# Altium PCB MedidorCO2_ver2.PcbDoc
Units mil, origin at the board's own origin, x right, y up, seen from the top; angles counter-clockwise.
Board outline 3307.09 x 3307.09 mil, 2 copper layers (Top Layer, Bottom Layer); 52 components, 35 nets, 196 pads, 52 vias.
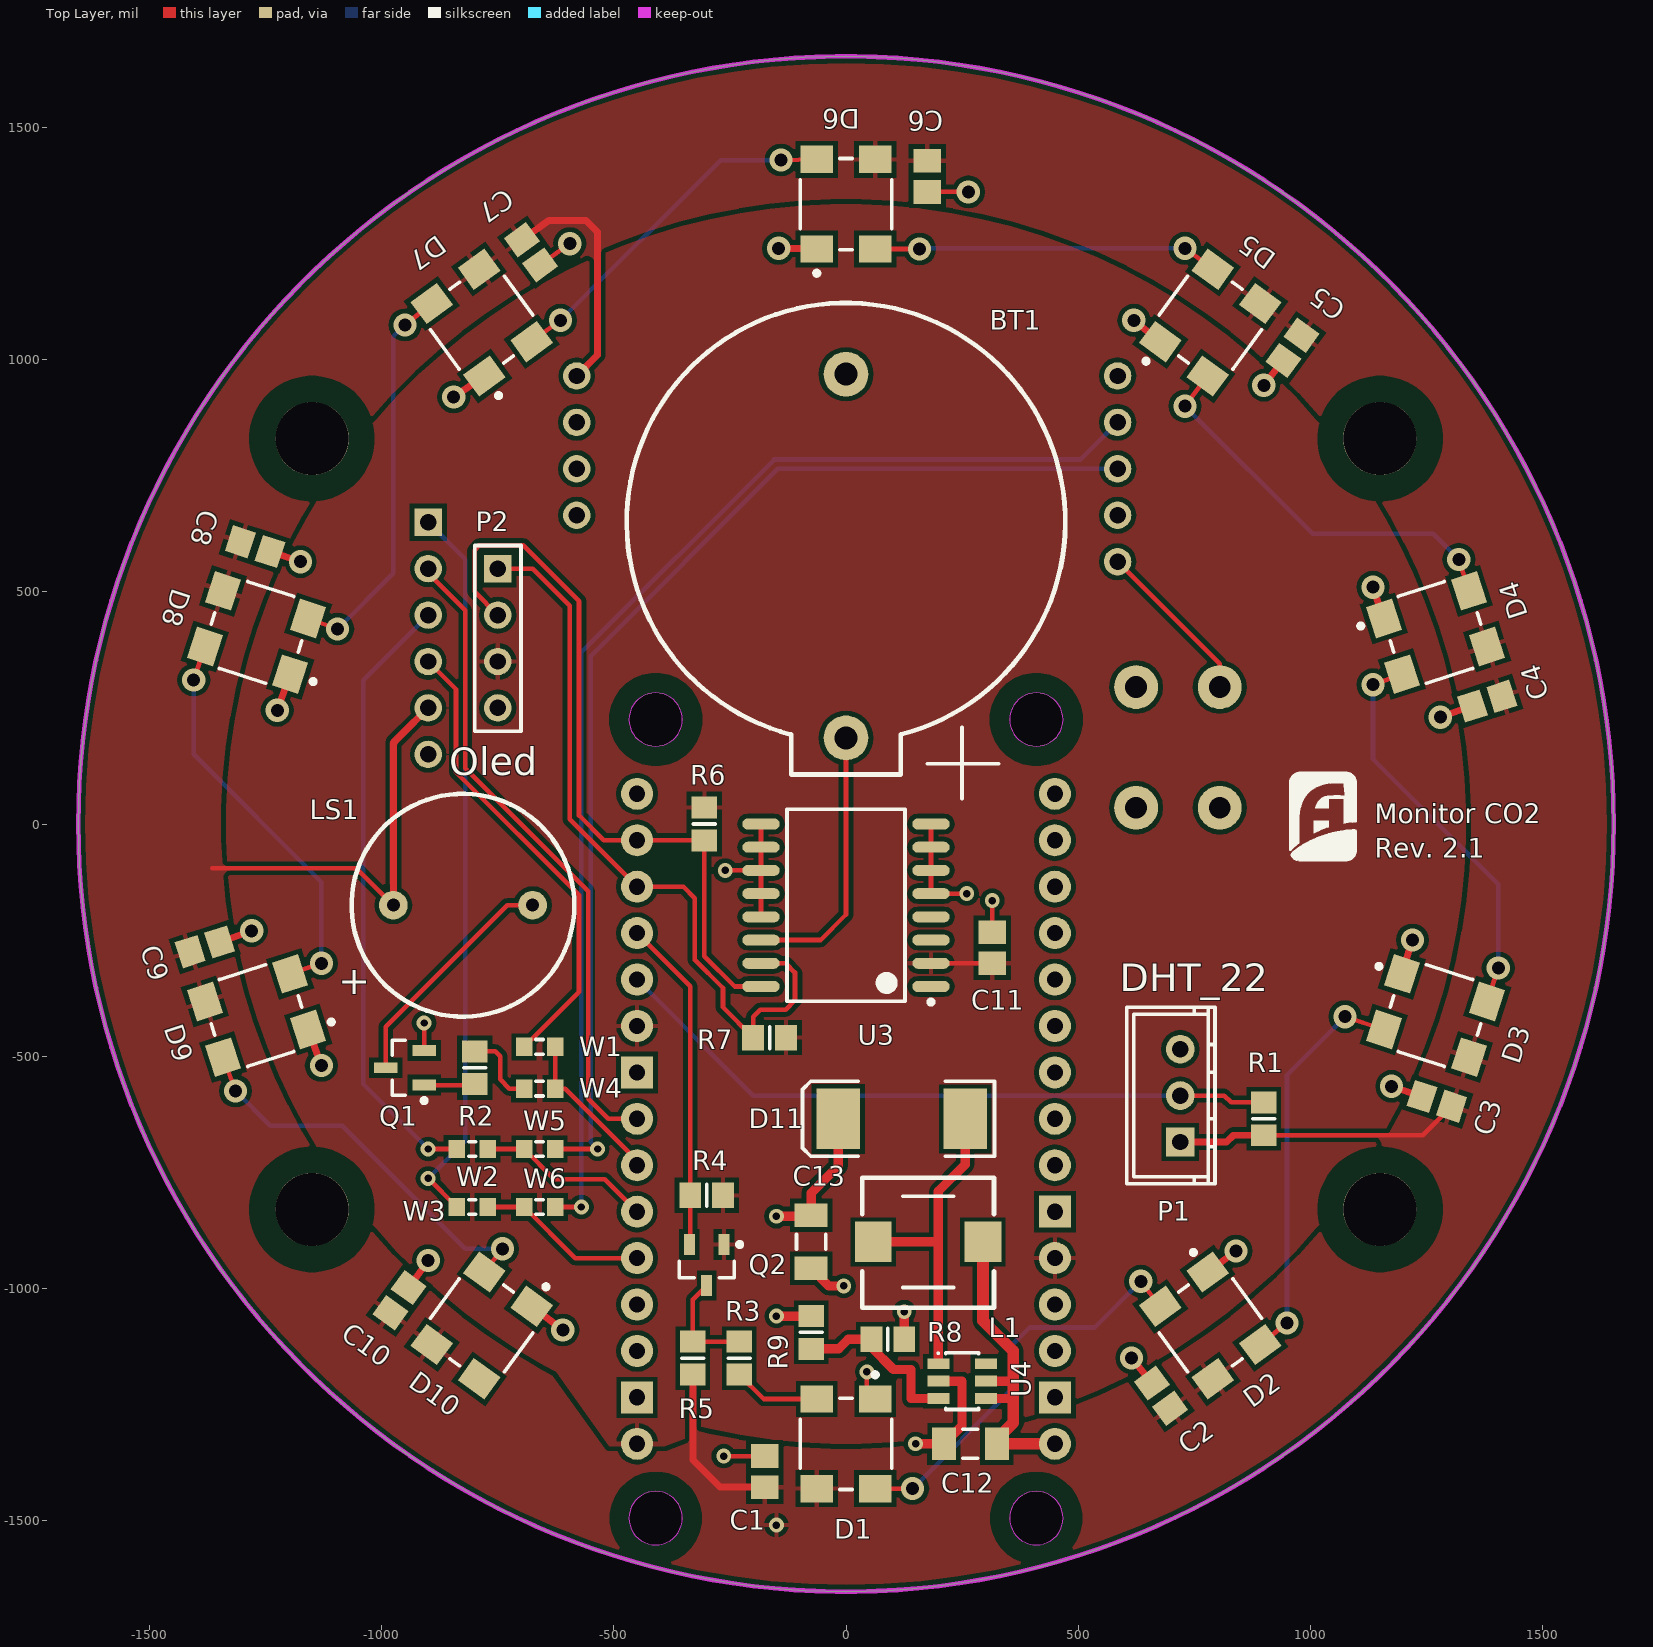
[diagram p0: Top Layer view]
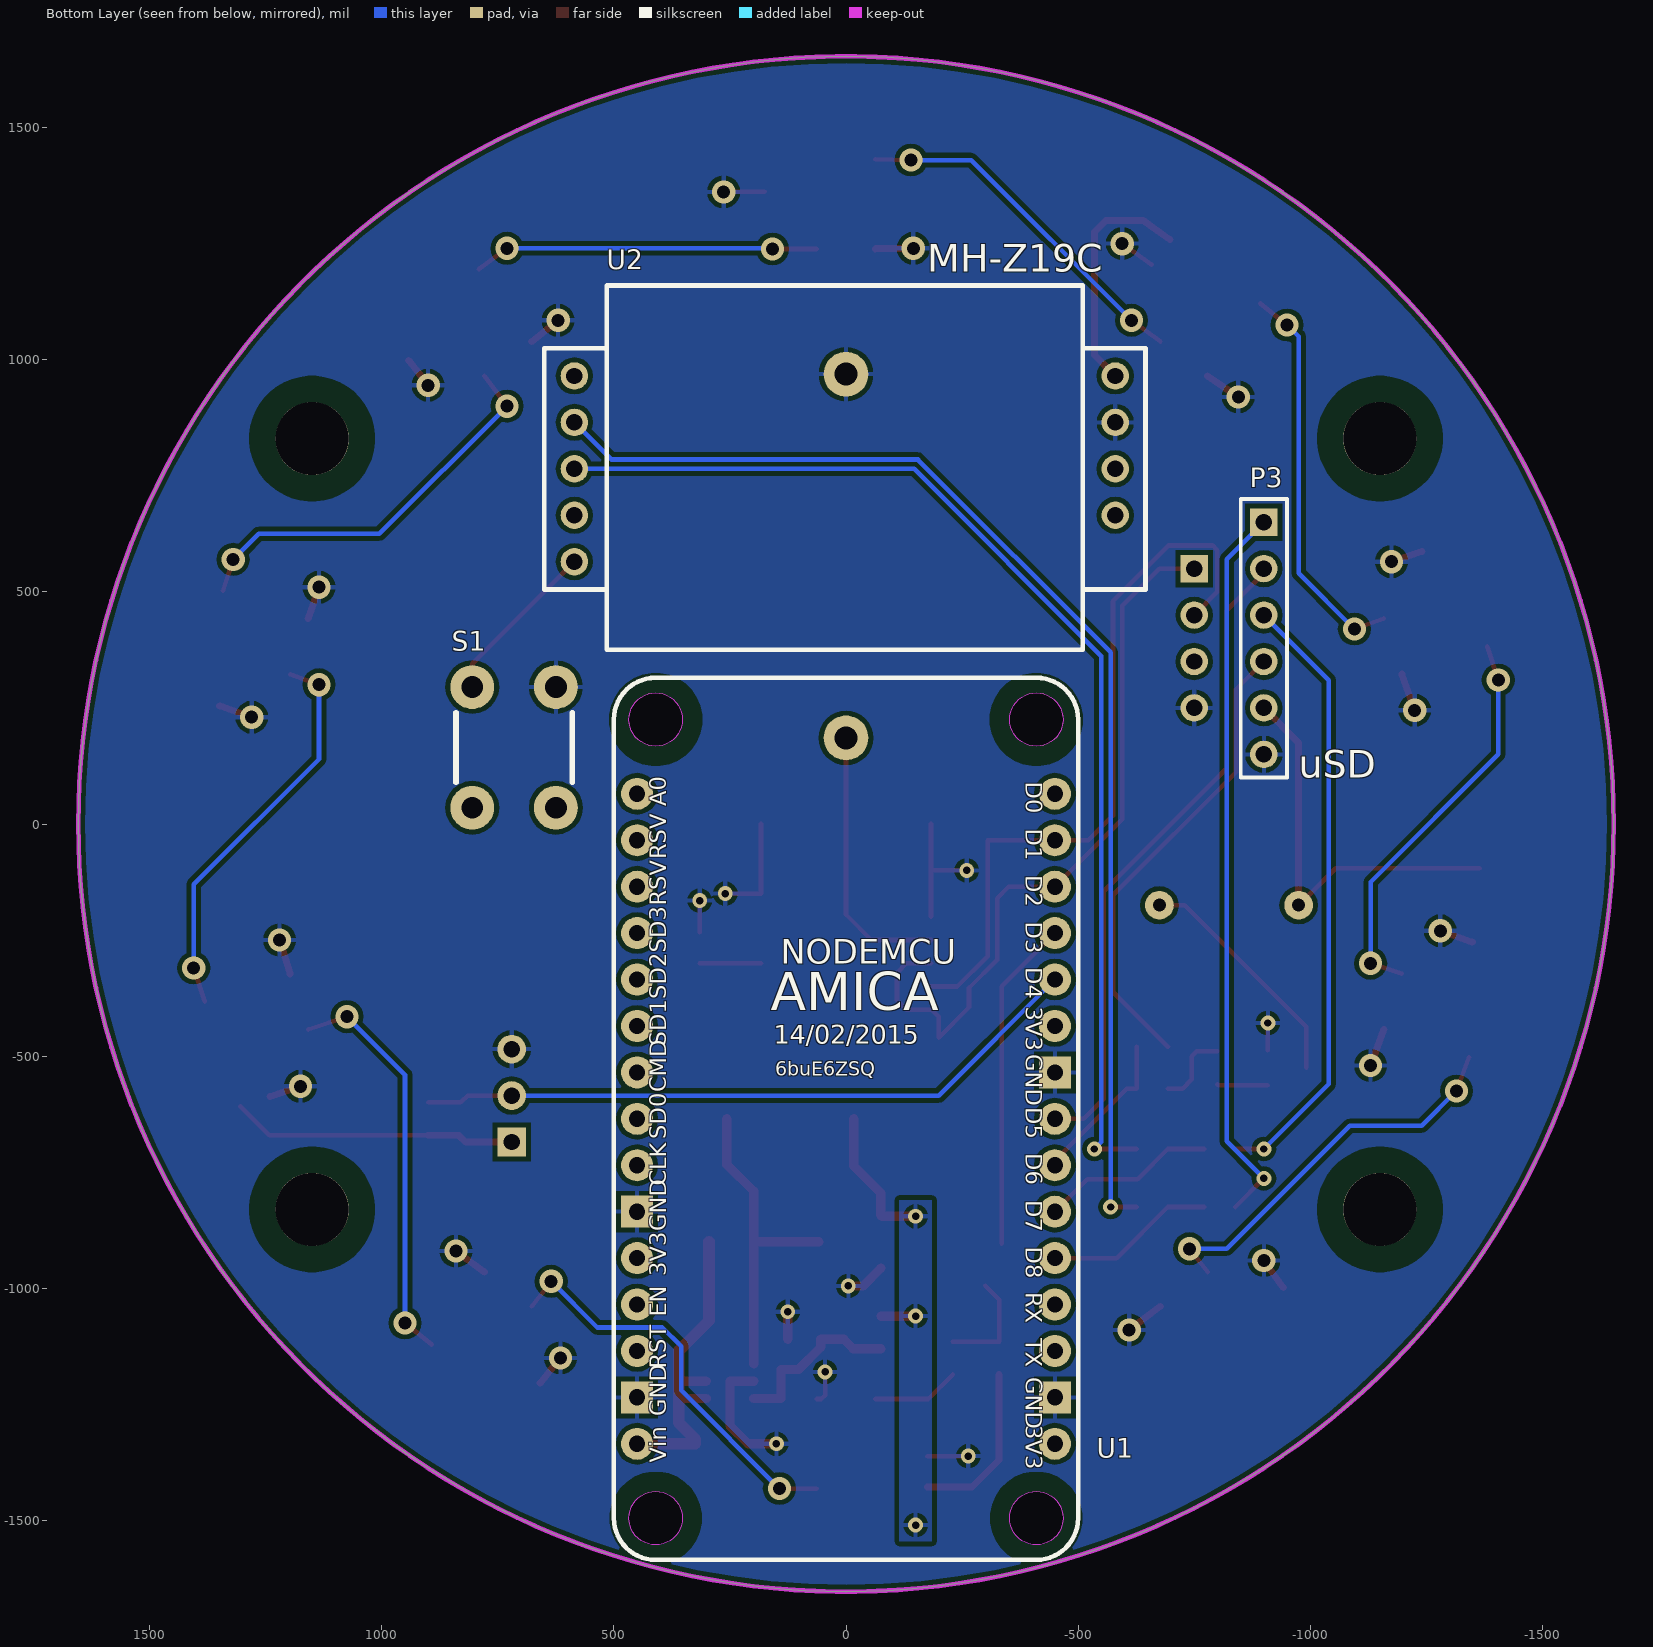
[diagram p1: Bottom Layer view, seen from below]

## Layer stack, top to bottom
Top Solder: solder mask 0.4, Solder Resist, Dk 3.5
Top Layer: signal copper 1.4
Dielectric 1: dielectric 12.6, FR-4, Dk 4.8
Bottom Layer: signal copper 1.4
Bottom Solder: solder mask 0.4, Solder Resist, Dk 3.5

## Board outline
-1653.54,0 ccw(c0,0) 0,-1653.54 ccw(c0,0) 1653.54,0 ccw(c0,0) 0,1653.54 ccw(c0,0)

## Design rules (kind name [scope] priority, off if disabled: settings)
Clearance [All] p1: gap=10
HoleSize [All] p1: absolutevalues=TRUE maxlimit=200 minlimit=1 maxpercent=80.000 minpercent=20.000
PolygonConnect [All] p1: connectstyle=Relief reliefconductorwidth=10 reliefentries=4 polygonreliefangle="90 Angle" airgapwidth=10
RoutingVias [All] p1: holewidth=28 width=50 viastyle="Through Hole" minholewidth=16 minwidth=32 maxholewidth=28 maxwidth=50
SolderMaskExpansion [All] p1: expansion=4
Width [All] p1: maxlimit=25 minlimit=10 preferedwidth=10
29 further rules are at their usual default settings.

## Components (designator, comment, footprint, x,y, rotation, side; value= is the part's Value field where it differs from the comment)
BT1 "Li-3V" BAT_LI_3V 0,650 r180 top
C1 "100nF" CAPC2012N -175,-1395 r90 top
C2 "100nF" CAPC2012N 678.38,-1231.44 r126 top
C3 "100nF" CAPC2012N 1272.65,-597.51 r162 top
C4 "100nF" CAPC2012N 1380.8,264.64 r198 top
C5 "100nF" CAPC2012N 961.54,1025.72 r234 top
C6 "100nF" CAPC2012N 175,1395 r270 top
C7 "100nF" CAPC2012N -678.38,1231.44 r306 top
C8 "100nF" CAPC2012N -1272.65,597.51 r342 top
C9 "100nF" CAPC2012N -1380.8,-264.64 r18 top
C10 "100nF" CAPC2012N -961.54,-1025.72 r54 top
C11 "100nF" CAPC2012N 315,-266.54 r90 top
C12 "22uF" CAPC3216N 267.91,-1335 r0 top
C13 "22uF" CAPC3216N -75,-900 r90 top
D1 "Neopixel_5050" Neopixel_5050 0,-1335 r90 top
D2 "Neopixel_5050" Neopixel_5050 784.69,-1080.04 r126 top
D3 "Neopixel_5050" Neopixel_5050 1269.66,-412.54 r162 top
D4 "Neopixel_5050" Neopixel_5050 1269.66,412.54 r198 top
D5 "Neopixel_5050" Neopixel_5050 784.69,1080.04 r234 top
D6 "Neopixel_5050" Neopixel_5050 0,1335 r270 top
D7 "Neopixel_5050" Neopixel_5050 -784.69,1080.04 r306 top
D8 "Neopixel_5050" Neopixel_5050 -1269.66,412.54 r342 top
D9 "Neopixel_5050" Neopixel_5050 -1269.66,-412.54 r18 top
D10 "Neopixel_5050" Neopixel_5050 -784.69,-1080.04 r54 top
D11 "SS34" SMC 120,-635 r180 top
L1 "22uH" SMRH74-220MT 177,-900 r180 top
LS1 "Buzzer 3V" BUZZER -975,-175 r180 top
P1 "DHT_22" CON1X3 720,-685 r90 top
P2 "Oled" HDR1X4 -750,550 r270 top
P3 "uSD" HDR1X6 -900,650 r270 bottom
Q1 "MMBT3904" SOT23_N -950,-525 r180 top
Q2 "BSS138" SOT-23_N -300,-950 r270 top
R1 "10k" RESC2012N 900,-635 r270 top
R2 "1k" RESC2012N -800,-525 r270 top
R3 "470" RESC2012N -230,-1150.43 r270 top
R4 "10k" RESC2012N -300,-800 r0 top
R5 "10k" RESC2012N -330,-1150.43 r270 top
R6 "4.7k" RESC2012N -305,0 r90 top
R7 "4.7k" RESC2012N -164.57,-460 r0 top
R8 "15k - 1%" RESC2012N 90,-1110 r180 top
R9 "110k - 1%" RESC2012N -75,-1095 r90 top
S1 "SW-PB-6x6" pulsador2 805,295 r180 bottom
U1 "NodeMCU V1.0 ESP-12E" "NodeMCU V1.0 ESP-12E" -450,65 r180 bottom
U2 "MH-Z19C" MH-Z19C 585,965 r180 bottom
U3 "DS3231" "SOIC16 - DS3231" 0,-175 r180 top
U4 "MT3608" SOT23-6 250,-1200 r270 top
W1 "Jumper" RESC1608N -660,-480 r180 top
W2 "Jumper" RESC1608N -805,-700 r180 top
W3 "Jumper" RESC1608N -805,-825 r180 top
W4 "Jumper" RESC1608N -660,-570 r180 top
W5 "Jumper" RESC1608N -660,-700 r0 top
W6 "Jumper" RESC1608N -660,-825 r0 top

## Footprints (in the part's own frame and the unit in brackets; to place one, negate y for a bottom-side part, rotate by r counter-clockwise, add the part's x,y. Pads: shape width x height; smd on the part's side, far side on the other; paste and mask are expansions set on the pad)
BAT_LI_3V [mm] "Battery Retainer for 20mm Dia. cell, Thru-Hole; Body 21.1 x 19.9 mm"
  round 2.45 hole 1.25: 1(0,11.8) 2(0,-8.1)
  silkscreen extent -12,-12 12,15.11
BUZZER [mil]
  round 62 hole 28: 1(0,0) 2(-300,0)
  silkscreen extent -390,-240 90,240
CAPC2012N [mm] "Chip Capacitor, Body 2.0x1.3mm, IPC Medium Density"
  rect 1.3x1.5 smd: 1(-0.85,0) 2(0.85,0)
  body extent -1.1,-0.72 1.1,0.72, height 1.1
CAPC3216N [mm] "Chip Capacitor, Body 3.2x1.6mm, IPC Medium Density"
  rect 1.3x1.8 smd: 1(-1.45,0) 2(1.45,0)
  silkscreen extent -0.4,-0.8 0.4,0.8, body extent -1.7,-0.9 1.7,0.9, height 1.35
CON1X3 [mil] "Connector; Header; 3 Position"
  rect 62x62 hole 35.43: 1(0,0)
  round 62 hole 35.43: 2(100,0) 3(200,0)
  silkscreen extent -90,-75 290,115
HDR1X4 [mm] "Connector; Header; 4 Position"
  rect 1.5x1.5 hole 0.9: 1(0,0)
  round 1.5 hole 0.9: 2(2.54,0) 3(5.08,0) 4(7.62,0)
  silkscreen extent -1.27,-1.27 8.89,1.27
HDR1X6 [mm] "Connector; Header; 6 Position"
  rect 1.5x1.5 hole 0.9: 1(0,0)
  round 1.5 hole 0.9: 2(2.54,0) 3(5.08,0) 4(7.62,0) 5(10.16,0) 6(12.7,0)
  silkscreen extent -1.27,-1.27 13.97,1.27
MH-Z19C [mm] "Sensor CO2"
  round 1.5 hole 0.9: AOT(29.591,-5.08) GND(29.591,-2.54) HD(0,-10.16) PWM(29.591,-7.62) Rx(0,-2.54) SR(0,-7.62) Tx(0,-5.08) Vin(29.591,0) Vo(0,0)
  silkscreen extent -1.65,-14.99 31.24,4.95
Neopixel_5050 [mm] "Adafruit Neopixel 5050 Addressable LED WS2812B/SK6812"
  rect 1.5x1.8 smd paste+0 mask+0: 1(2.45,-1.6) 2(2.45,1.6) 3(-2.45,1.6) 4(-2.45,-1.6)
  silkscreen extent -2.5,-2.5 3.9,2.5, body extent -3.3,-2.6 3.3,2.6, height 0.25
"NodeMCU V1.0 ESP-12E" [mil]
  round 115 hole 115 unplated paste-300 mask-300: 0(-860,-1560) 0(-860,160) 0(-40,-1560) 0(-40,160)
  round 69 hole 35: 3V3(-900,-1000) 3V3(0,-1400) 3V3(0,-500) A0(-900,0) CLK(-900,-800) CMD(-900,-600) D0(0,0) D1(0,-100) D2(0,-200) D3(0,-300) D4(0,-400) D5(0,-700) D6(0,-800) D7(0,-900) D8(0,-1000) EN(-900,-1100) RST(-900,-1200) RSV(-900,-200) RSV(-900,-100) RX(0,-1100) SD0(-900,-700) SD1(-900,-500) SD2(-900,-400) SD3(-900,-300) TX(0,-1200) VIN(-900,-1400)
  rect 69x69 hole 35: GND(-900,-1300) GND(-900,-900) GND(0,-1300) GND(0,-600)
  Keep-Out Layer circle w2: c-860,160 r57.5
  Keep-Out Layer circle w2: c-40,160 r57.5
  Keep-Out Layer circle w2: c-860,-1560 r57.5
  Keep-Out Layer circle w2: c-40,-1560 r57.5
  silkscreen extent -950,-1650 50,250
pulsador2 [mm]
  round 2.4 hole 1.2: 1(0,0) 2(4.572,0) 3(0,-6.604) 4(4.572,-6.604)
  silkscreen extent -0.89,-5.21 5.46,-1.4
RESC1608N [mm] "Chip Resistor, Body 1.6x0.8mm, IPC Medium Density"
  rect 0.9x1 smd: 1(-0.85,0) 2(0.85,0)
  silkscreen extent -0.2,-0.4 0.2,0.4, body extent -0.85,-0.48 0.85,0.48, height 0.6
RESC2012N [mm] "Chip Resistor, Body 2.0x1.3mm, IPC Medium Density"
  rect 1.2x1.4 smd: 1(-0.9,0) 2(0.9,0)
  silkscreen extent 0,-0.6 0,0.6, body extent -1.07,-0.7 1.07,0.7, height 0.65
SMC [mm] "DO-214-AB/SMC; 2 C-Bend Leads; Body 7.9 x 5.9 mm, inc. leads (LxW)"
  rect 2.4x3.3 smd: 1(-3.475,0) 2(3.475,0)
  silkscreen extent -5.07,-2.05 5.43,2.05
SMRH74-220MT [mil] "Power inductor SMRH74-220MT"
  rect 79x86.61 smd: 1(-118,0) 2(118,0)
  silkscreen extent -142,-138 142,142
"SOIC16 - DS3231" [mm] "SOIC, 16-Leads, Body 10.5x7.6mm (max), Pitch 1.27mm, IPC Medium Density"
  oval 2.05x0.6 smd: 1(-4.65,4.445) 2(-4.65,3.175) 3(-4.65,1.905) 4(-4.65,0.635) 5(-4.65,-0.635) 6(-4.65,-1.905) 7(-4.65,-3.175) 8(-4.65,-4.445) 9(4.65,-4.445) 10(4.65,-3.175) 11(4.65,-1.905) 12(4.65,-0.635) 13(4.65,0.635) 14(4.65,1.905) 15(4.65,3.175) 16(4.65,4.445)
  silkscreen extent -4.78,-5.25 3.22,5.42, body extent -3.81,-5.23 3.81,5.23, height 2.67
SOT23-6 [mm] "SOT-457/SC-74; 6 Leads; Body 3 x 3 mm, inc. leads (LxW max)"
  rect 0.6x1.2 smd: 1(-0.95,-1.3) 2(0,-1.3) 3(0.95,-1.3) 4(0.95,1.3) 5(0,1.3) 6(-0.95,1.3)
  silkscreen extent -1.57,-1.35 1.55,0.9
SOT23_N [mm] "SOT23, 3-Leads, Body 2.9x1.3mm, Pitch 0.95mm, Lead Span 2.3mm, IPC Medium Density"
  rect 1.3x0.6 smd: 1(-1.05,0.95) 2(-1.05,-0.95) 3(1.05,0)
  silkscreen extent -1.18,-1.5 0.7,1.92, body extent -0.7,-1.5 0.7,1.5, height 1.1
SOT-23_N [mm] "SOT23, 3-Leads, Body 2.9x1.3mm, Pitch 0.95mm, Lead Span 2.5mm, IPC Medium Density"
  rect 1.15x0.6 smd: 1(-1.125,0.95) 2(-1.125,-0.95) 3(1.125,0)
  silkscreen extent -1.25,-1.5 0.7,1.93, body extent -0.7,-1.5 0.7,1.5, height 1.1

## Part data
BT1: library part Battery, "Multicell Battery"
C1 C2 C3 C4 C5 C6 C7 C8 C9 C10 C11 C12 C13: library part "Cap Semi", "Capacitor (Semiconductor SIM Model)"
D1 D2 D3 D4 D5 D6 D7 D8 D9 D10: "Adafruit Neopixel 5050 Addressable LED WS2812B/SK6812"
D11: library part "D Schottky", "Schottky Diode SS34"
L1: library part Inductor, "Inductor SMRH74-220MT"
LS1: library part Bell, "Electrical Bell"
P1: library part "Header 3", "Header, 3-Pin"
P2: library part "Header 4", "Header, 4-Pin"
P3: library part "Header 6", "Header, 6-Pin"
Q1: "NPN Switching Transistor"
Q2: library part NMOS-2, "N-Channel Power MOSFET"
R1 R2 R3 R4 R5 R6 R7 R8 R9: library part Res1, "Resistor"
S1: "Switch"
U1: "NodeMCU V1.0 ESP8266 (ESP-12E)"
U2: "Sensor CO2"
U3: "Extremely Accurate I2C-Integrated  RTC/TCXO/Crystal"
U4: "Boost converter"
W1 W2 W3 W4 W5 W6: "Jumper Wire"

## Free pads (board coordinates)
  round 157.48 hole 157.48: 0(-1150,-830) 0(-1150,830) 0(1150,-830) 0(1150,830)

## Via types
v1: diameter 50, hole 28, Top Layer to Bottom Layer, 36 vias
v2: diameter 32, hole 16, Top Layer to Bottom Layer, 16 vias

## Nets (pads, with @x,y where several pads share a name; then routed paths per layer and width w, separated by ;. In a path a pad name is that pad's centre, name@x,y a point inside that pad or via, vN(x,y) a via of type N, cw(c..) or ccw(c..) an arc to the next point about the centre after c; other vN are vias at no path point)
3V3: C11.1 P2.3 Q2.1 R4.2 R6.2 R7.2 U1.3V3 U3.2 | length 131.9
  Top Layer w10: U3.2 C11.1
+5V: C1.1 C2.1 C3.1 C4.1 C5.1 C6.1 C7.1 C8.1 C9.1 C10.1 C13.2 D1.3 D2.3 D3.3 D4.3 D5.3 D6.3 D7.3 D8.3 D9.3 D10.3 D11.2 LS1.1 P1.1 P3.5 R1.2 R5.2 R9.2 U2.Vin | length 2753.9
  Top Layer w10: -1365,-95 -1055,-95 LS1.1 ; R1.2 1241.89,-670.43 C3.1
  Top Layer w15: LS1.1 -975,175 P3.5 ; C7.1 -640.21,1300 -560,1300 -535,1275 -535,1010 U2.Vin ; R5.2 -330,-1370 -271.54,-1428.46 C1.1 ; P1.1 820,-685 834.57,-670.43 R1.2
  Top Layer w20: v2(-150,-1060) R9.2@-75.43,-1060 ; v2(-150,-845) C13.2@-77.09,-845 ; C13.2 -75,-795 -16.81,-736.81 D11.2
  other v2: -150,-1510
D3: Q2.2 R4.1 U1.D3 | length 716.2
  Top Layer w10: U1.D3 -335.43,-349.57 R4.1 Q2.2@-335.43,-903.74
D4: P1.2 R1.1 U1.D4 | length 1459.6
  Top Layer w10: P1.2 815,-585 829.57,-599.57 R1.1
  Bottom Layer w10: U1.D4 -200,-585 P1.2
D5: P3.2 U1.D5 | length 1407.5
  Top Layer w10: P3.2 -900,540 -820,460 -820,120 -555,-145 -555,-591.72 -511.72,-635 U1.D5
D6: U1.D6 W1.1 W4.1 | length 340.7
  Top Layer w10: W1.1 W4.1 -605,-570 -450,-725 U1.D6
D7: U1.D7 W2.1 W5.1 | length 377.5
  Top Layer w10: W2.1 W5.1 -628.46,-765 -520,-765 U1.D7
D8: U1.D8 W3.1 W6.1 | length 367.1
  Top Layer w10: W3.1 W6.1 -583.46,-935 U1.D8
GND: BT1.2 C1.2 C2.2 C3.2 C4.2 C5.2 C6.2 C7.2 C8.2 C9.2 C10.2 C11.2 C12.1 C13.1 D1.1 D2.1 D3.1 D4.1 D5.1 D6.1 D7.1 D8.1 D9.1 D10.1 P1.3 P2.4 P3.6 Q1.2 R8.1 S1.2 U1.GND U2.GND U3.5 U3.6 U3.7 U3.8 U3.9 U3.10 U3.11 U3.12 U3.13 U4.2 | length 2569.6
  Top Layer w10: Q1.2 v2(-908.66,-428.66) ; C7.2 v1(-595,1250) ; v2(-263.46,-1361.54) C1.2 ; v2(-260,-100) U3.11 ; U3.13 U3.12 U3.11 ; U3.9 U3.10 U3.11 ; v2(45,-1180) 45,-1230 53.54,-1238.54 D1.1 ; C6.2 v1(263.46,1361.54) ; U3.8 U3.7 U3.6 U3.5 v2(260,-150) ; C11.2 v2(315,-165)
  Top Layer w15: C9.2 v1(-1280,-230) ; C8.2 v1(-1175,565) ; v1(-1225,245) D8.1 ; D9.1 v1(-1130,-520) ; C10.2 v1(-900,-940) ; v1(-845,920) D7.1 ; D10.1 v1(-610,-1090) ; v1(-145,1240) -64.45,1240 D6.1 ; v1(615,-1150) C2.2 ; v1(620,1085) D5.1 ; D2.1 v1(840,-920) ; v1(900,945) C5.2 ; v1(1135,510) D4.1 ; v1(1175,-565) C3.2 ; D3.1 v1(1220,-250) ; v1(1280,230) C4.2
  Top Layer w20: C13.1 -37.09,-995 v2(-5,-995) ; R8.1 v2(125.43,-1050.43) ; v2(150,-1335) C12.1 250,-1295.83 250,-1200 U4.2
NetBT1_1: BT1.1 U3.14 | length 586.3
  Top Layer w10: U3.14 -55,-250 0,-195 BT1.1
NetD1_2: D1.2 R3.2 | length 188.8
  Top Layer w10: R3.2 -177.32,-1238.54 D1.2
NetD1_4: D1.4 D2.2 | length 881
  Top Layer w10: D1.4 v1(143.54,-1431.46) ; v1(635,-985) D2.2
  Bottom Layer w10: v1(143.54,-1431.46) 355,-1220 355,-1125 395.5,-1084.5 535.5,-1084.5 v1(635,-985)
NetD2_4: D2.4 D3.2 | length 873.5
  Top Layer w10: D2.4 v1(950,-1075) ; v1(1075,-415) D3.2
  Bottom Layer w10: v1(950,-1075) 950,-540 v1(1075,-415)
NetD3_4: D3.4 D4.2 | length 864.6
  Top Layer w10: v1(1135,300) D4.2 ; D3.4 v1(1405,-310)
  Bottom Layer w10: v1(1135,300) 1135,140 1405,-130 v1(1405,-310)
NetD4_4: D4.4 D5.2 | length 879.3
  Top Layer w10: v1(730,900) D5.2 ; v1(1320,570) D4.4
  Bottom Layer w10: v1(730,900) 1005,625 1265,625 v1(1320,570)
NetD5_4: D5.4 D6.2 | length 740.8
  Top Layer w10: D6.2 v1(158.54,1238.54) ; v1(730,1240) D5.4
  Bottom Layer w10: v1@160,1240 v1(730,1240)
NetD6_4: D6.4 D7.2 | length 772.1
  Top Layer w10: D7.2 v1(-615,1085) ; v1(-140,1430) D6.4
  Bottom Layer w10: v1(-615,1085) -270,1430 v1(-140,1430)
NetD7_4: D7.4 D8.2 | length 856.2
  Top Layer w10: D8.2 v1(-1095,420) ; v1(-950,1075) D7.4
  Bottom Layer w10: v1(-1095,420) -975,540 -975,1050 v1(-950,1075)
NetD8_4: D8.4 D9.2 | length 871.4
  Top Layer w10: v1(-1405,310) D8.4 ; D9.2 v1(-1130,-300)
  Bottom Layer w10: v1(-1405,310) -1405,150 -1130,-125 v1(-1130,-300)
NetD9_4: D9.4 D10.2 | length 856.8
  Top Layer w10: D9.4 v1(-1315,-575) ; D10.2 v1(-740,-915)
  Bottom Layer w10: v1(-1315,-575) -1240,-650 -1085,-650 -820,-915 v1(-740,-915)
NetD11_1: D11.1 L1.2 U4.1 | length 691.4
  Top Layer w20: L1.2 198.82,-900 ; U4.1 198.82,-900 ; D11.1 256.81,-733.19 198.82,-791.18 198.82,-900
NetLS1_2: LS1.2 Q1.3 | length 513.2
  Top Layer w10: Q1.3 -991.34,-436.34 -730,-175 LS1.2
NetP3_1: P3.1 W3.2 | length 1566.8
  Top Layer w10: v2(-900,-763.46) W3.2
  Bottom Layer w10: v2(-900,-763.46) -820,-683.46 -820,570 P3.1
NetP3_3: P3.3 W2.2 | length 1327.5
  Top Layer w10: v2(-900,-700) W2.2
  Bottom Layer w10: v2(-900,-700) -1040,-560 -1040,310 P3.3
NetP3_4: P3.4 W1.2 | length 1013.7
  Top Layer w10: P3.4 -840,290 -840,111.72 -575,-153.28 -575,-361.54 W1.2
NetQ1_1: Q1.1 R2.2 | length 109.5
  Top Layer w10: Q1.1 -801.97,-562.4 R2.2
NetQ2_3: Q2.3 R3.1 R5.1 | length 233.1
  Top Layer w10: Q2.3 -330,-1024.29 R5.1 R3.1
NetR2_1: R2.1 W4.2 | length 169.1
  Top Layer w10: R2.1 -755.43,-489.57 -745,-500 -745,-550 -725,-570 W4.2
NetR8_2: R8.2 R9.1 U4.3 | length 381.7
  Top Layer w20: R9.1 -15.43,-1130.43 5,-1110 R8.2 54.57,-1127.17 102.4,-1175 140,-1175 140,-1237.4 U4.3
NetS1_1: S1.1 U2.HD | length 361.1
  Top Layer w10: U2.HD 805,345 S1.1
NetU2_Rx: U2.Rx W6.2 | length 2611.6
  Top Layer w10: W6.2 v2(-570,-825)
  Bottom Layer w10: v2(-570,-825) -570,370 -155,785 505,785 U2.Rx
NetU2_Tx: U2.Tx W5.2 | length 2461.5
  Top Layer w10: W5.2 v2(-535,-700)
  Bottom Layer w10: v2(-535,-700) -550,-685 -550,361.72 -146.72,765 U2.Tx
SCL: P2.2 R6.1 U1.D1 U3.16 | length 1591.9
  Top Layer w10: P2.2 -800,500 -800,590 -790,600 -695,600 -575,480 -575,18.28 -521.72,-35 U1.D1 -305.43,-35 -305.43,-284.57 -240,-350 U3.16
SDA: P2.1 R7.1 U1.D2 U3.15 | length 1631.2
  Top Layer w10: P2.1 -675,550 -595,470 -595,10 U1.D2 -350,-135 -325.43,-159.57 -325.43,-292.85 -265,-353.28 -265,-395 R7.1 -200,-415 -185,-400 -130,-400 -110,-380 -110,-320 -130,-300 U3.15
VIN: C12.2 L1.1 U1.VIN U4.4 U4.5 | length 719.1
  Top Layer w20: U4.4 360,-1237.4 ; U4.5 360,-1200
  Top Layer w25: L1.1 295,-1070 360,-1135 360,-1200 360,-1237.4 360,-1290 325,-1325 C12.2 U1.VIN
pads on no net: D10.4 S1.3 S1.4 U1.0 U1.A0 U1.CLK U1.CMD U1.D0 U1.EN U1.RST U1.RSV U1.RX U1.SD0 U1.SD1 U1.SD2 U1.SD3 U1.TX U2.AOT U2.PWM U2.SR U2.Vo U3.1 U3.3 U3.4 U4.6

## Polygon pours and split planes (outlines as drawn)
+5V on Bottom Layer "+5V_L02_P014" (solid, pour order 14): -185,-810 -185,-1545 -115,-1545 -115,-810
GND on Bottom Layer "Bottom-GND" (solid, remove dead copper, pour order 15): 0,1655 cw(c-0.73,0.73) 1653.54,0 cw(c-0.73,-0.73) 0,-1655 cw(c0,0) -1655,0 cw(c0,0)
3V3 on Top Layer "3V3_L01_P017" (solid, pour order 17): -635,-1165 -510,-1340 -390,-1340 -282.65,-1298.83
+5V on Top Layer "Top-5v" (solid, remove dead copper, pour order 18): 0,1655 cw(c-0.73,0.73) 1653.54,0 cw(c-0.73,-0.73) 0,-1655 cw(c0,0) -1655,0 cw(c0,0)
3V3 on Top Layer "Top Layer-3V3" (solid, remove dead copper, pour order 16): 0,1335 cw(c0.01,0) 1335,0 cw(c0.01,-0.01) 0,-1335 cw(c-0.01,-0.01) -1335,0 cw(c-0.01,0.01)

## Keep-outs
Keep-Out Layer:
  circle w10: c0,0 r1653.54

## Other copper
Multi-Layer:
  pour cut-out: 1150,-695 cw(c1150,-830) 1285,-830 cw(c1150,-830) 1150,-965 cw(c1150,-830) 1015,-830 cw(c1150,-830)
  pour cut-out: -1150,-695 cw(c-1150,-830) -1015,-830 cw(c-1150,-830) -1150,-965 cw(c-1150,-830) -1285,-830 cw(c-1150,-830)
  pour cut-out: -1150,965 cw(c-1150,830) -1015,830 cw(c-1150,830) -1150,695 cw(c-1150,830) -1285,830 cw(c-1150,830)
  pour cut-out: 1150,965 cw(c1150,830) 1285,830 cw(c1150,830) 1150,695 cw(c1150,830) 1015,830 cw(c1150,830)
  pour cut-out: -510,225 ccw(c-410,225) -410,125 ccw(c-410,225) -310,225 ccw(c-410,225) -410,325 ccw(c-410,225)
  pour cut-out: 310,225 ccw(c410,225) 410,125 ccw(c410,225) 510,225 ccw(c410,225) 410,325 ccw(c410,225)
  pour cut-out: -510,-1495 ccw(c-410,-1495) -410,-1595 ccw(c-410,-1495) -310,-1495 ccw(c-410,-1495) -410,-1395 ccw(c-410,-1495)
  pour cut-out: 310,-1495 ccw(c410,-1495) 410,-1595 ccw(c410,-1495) 510,-1495 ccw(c410,-1495) 410,-1395 ccw(c410,-1495)

## Silkscreen, mask and mechanical layers (free items; w line width, h text height)
Top Overlay:
  drawing of 3 lines, arcs and shapes, not listed
  text "Monitor CO2" at 1139,2 h42
  text "Rev. 2.1" at 1139,-73 h42

## Text inside footprints (layer, text, board x,y; h text height)
LS1: Top Overlay "+" at -1025,-315 h60 r180
U1: Bottom Overlay "GND" at 375,-877 h60 r270; Bottom Overlay "3V3" at 375,-974 h60 r270; Bottom Overlay "EN" at 375,-1061 h60 r270; Bottom Overlay "RST" at 375,-1173 h60 r270; Bottom Overlay "GND" at 375,-1276 h60 r270; Bottom Overlay "Vin" at 375,-1376 h60 r270; Bottom Overlay "D7" at -375,-810.23 h60 r90; Bottom Overlay "D8" at -375,-910.11 h60 r90; Bottom Overlay "RX" at -375,-1009.06 h60 r90; Bottom Overlay "TX" at -375,-1108 h60 r90; Bottom Overlay "GND" at -375,-1191.2 h60 r90; Bottom Overlay "3V3" at -375,-1295 h60 r90; Bottom Overlay "D6" at -375,-709.12 h60 r90; Bottom Overlay "CMD" at 375,-578.14 h60 r270; Bottom Overlay "D0" at -375,91 h60 r90; Bottom Overlay "D1" at -375,-10.35 h60 r90; Bottom Overlay "D2" at -375,-110.58 h60 r90; Bottom Overlay "D3" at -375,-210.58 h60 r90; Bottom Overlay "D4" at -375,-309 h60 r90; Bottom Overlay "3V3" at -375,-394.01 h60 r90; Bottom Overlay "GND" at -375,-496 h60 r90; Bottom Overlay "D5" at -375,-610 h60 r90; Bottom Overlay "A0" at 375,38 h60 r270; Bottom Overlay "RSV" at 375,-76 h60 r270; Bottom Overlay "RSV" at 375,-176.43 h60 r270; Bottom Overlay "SD3" at 375,-276.86 h60 r270; Bottom Overlay "SD2" at 375,-377.29 h60 r270; Bottom Overlay "SD1" at 375,-477.71 h60 r270; Bottom Overlay "SD0" at 375,-678.57 h60 r270; Bottom Overlay "CLK" at 375,-779 h60 r270; Bottom Overlay "6buE6ZSQ" at 152,-542 h30; Bottom Overlay "NODEMCU" at 141,-318 h90; Bottom Overlay "AMICA" at 162,-428 h140; Bottom Overlay "14/02/2015" at 156,-487 h69